# Altium PCB CNC Main Board.PcbDoc (part 1 of 2)
Units mil, origin at the board's own origin, x right, y up, seen from the top; angles counter-clockwise.
Board outline 6000 x 4000 mil, 2 copper layers (Top Layer, Bottom Layer); 82 components, 189 nets, 604 pads, 302 vias.
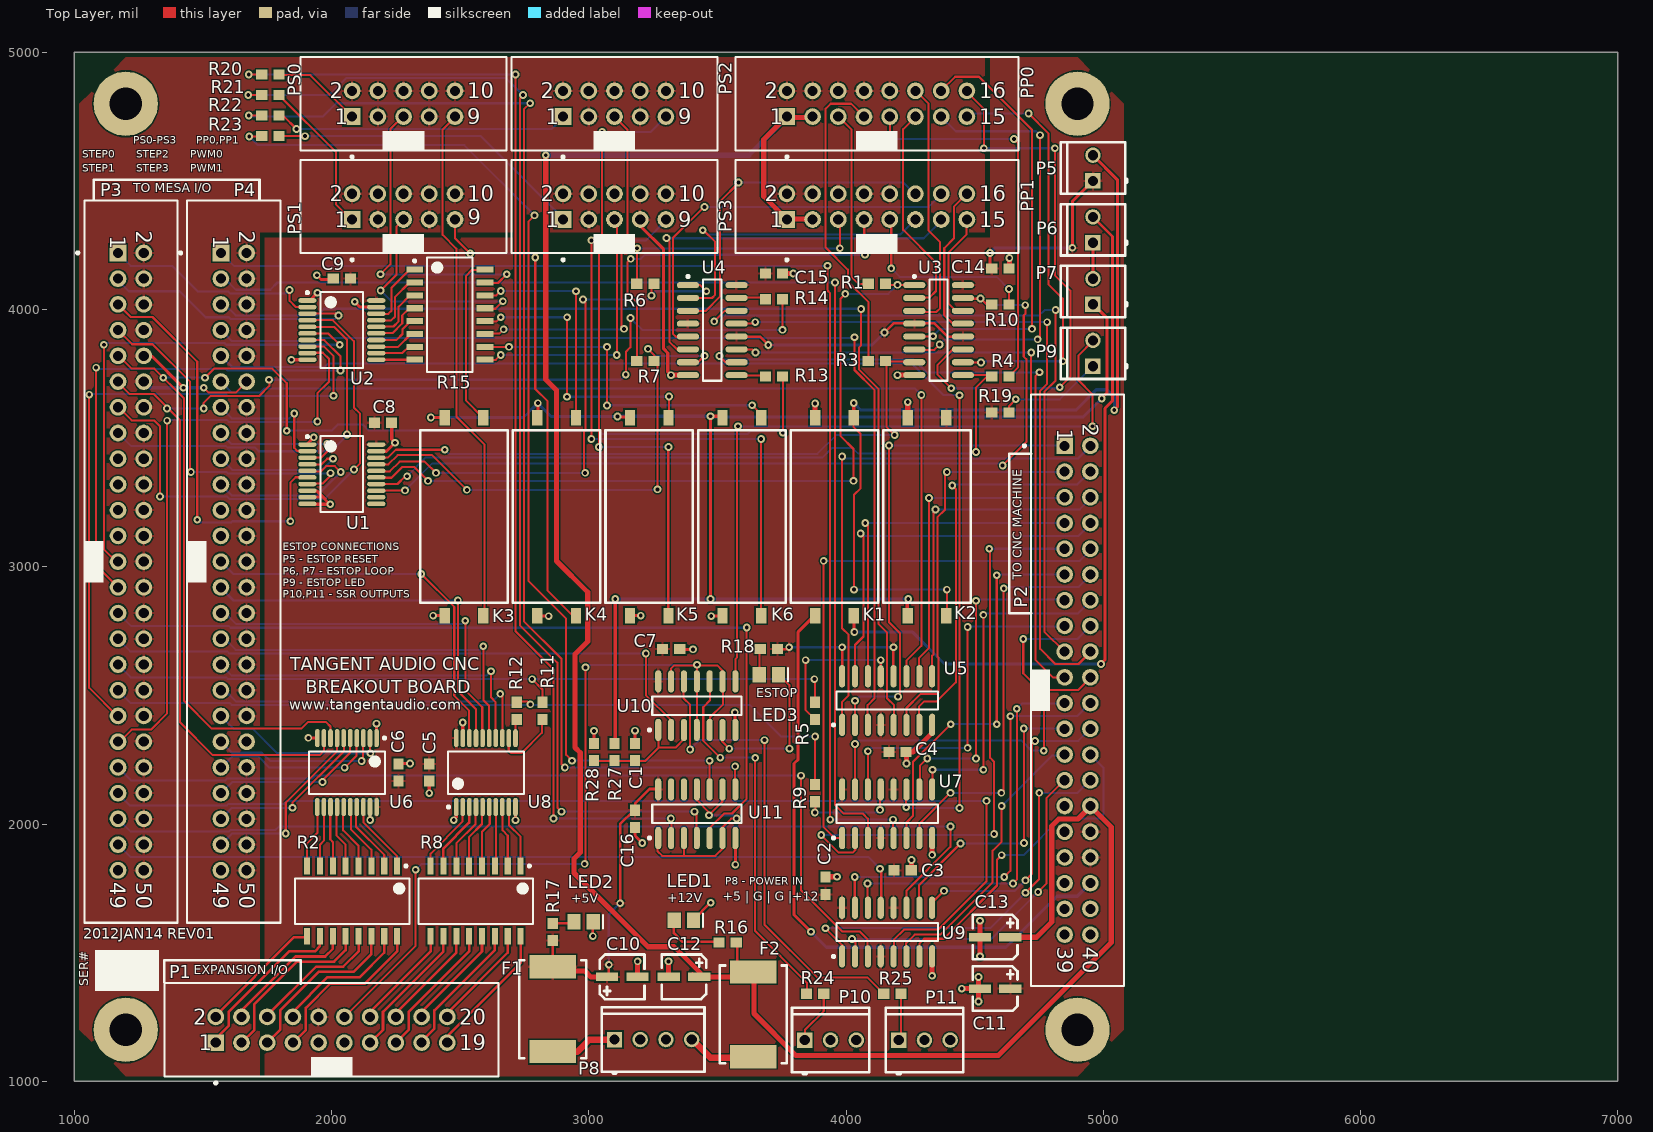
[diagram p0: Top Layer view]
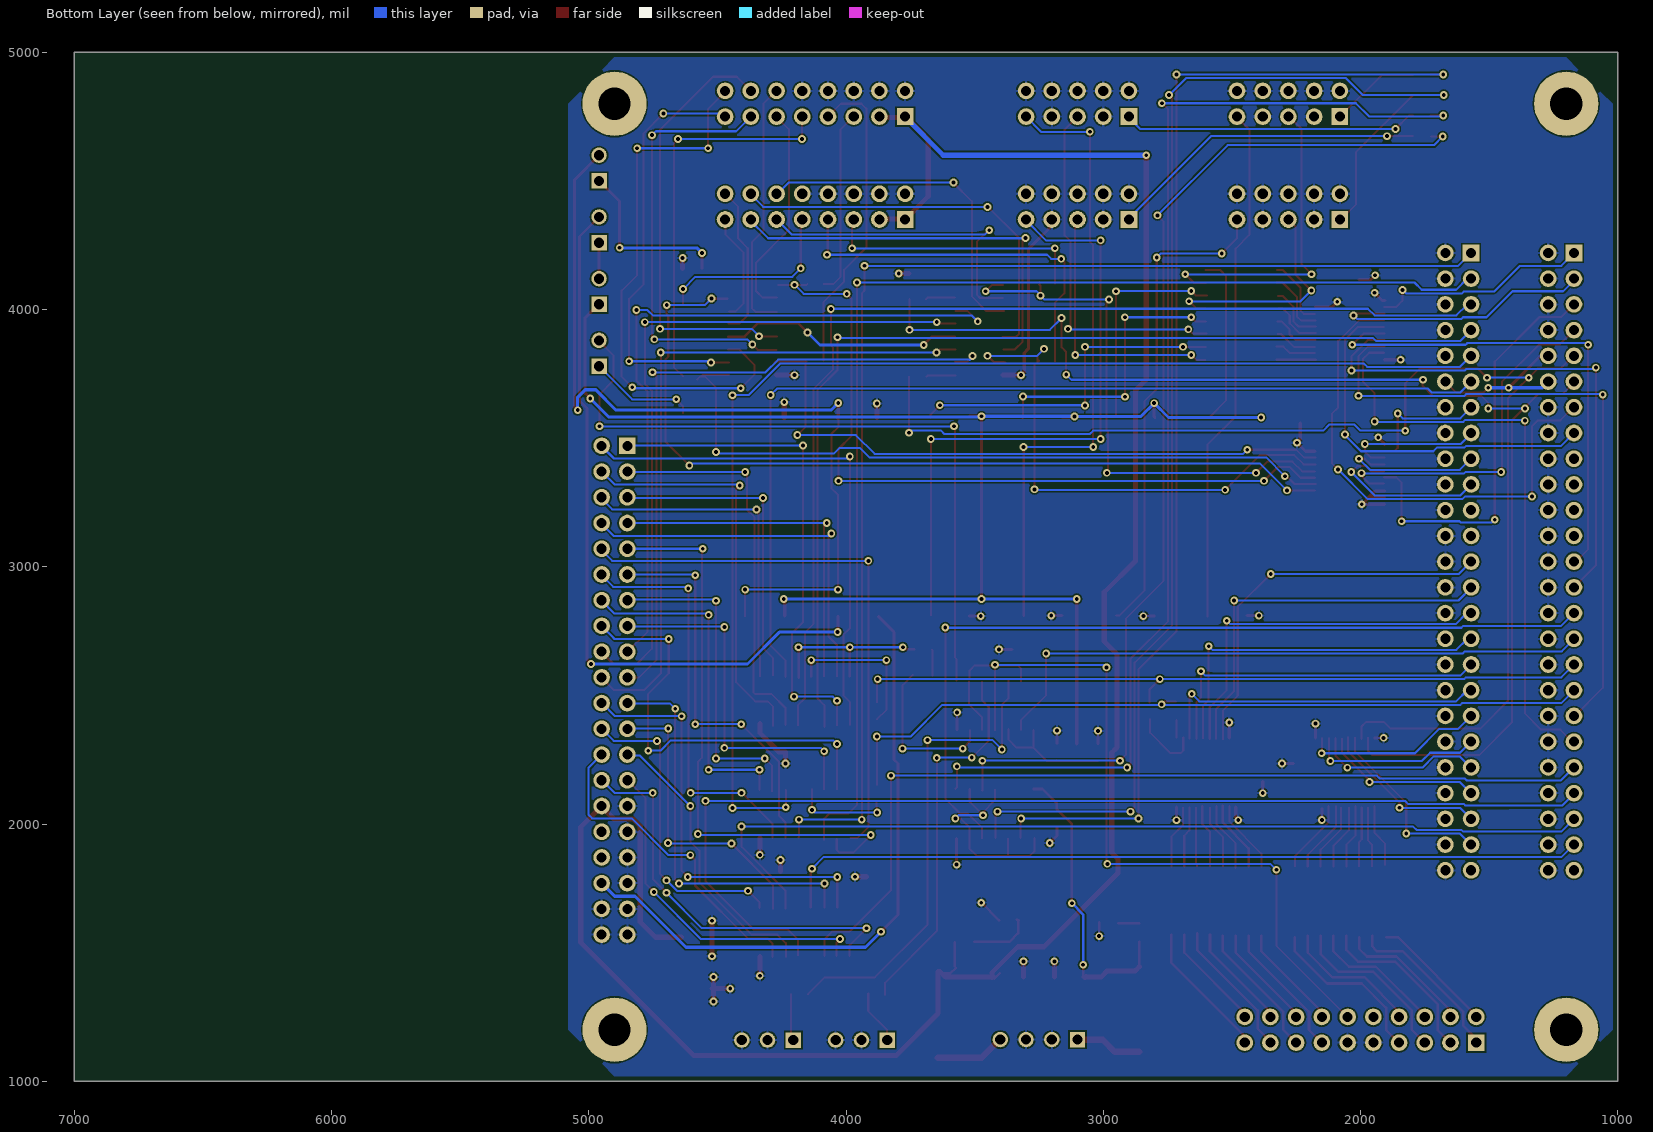
[diagram p1: Bottom Layer view, seen from below]

## Layer stack, top to bottom
Top Layer: signal copper 1.4
Dielectric: dielectric 12.6, FR-4, Dk 4.8
Bottom Layer: signal copper 1.4

## Board outline
1000,1000 7000,1000 7000,5000 1000,5000

## Design rules (kind name [scope] priority, off if disabled: settings)
Clearance [All] p1: gap=6
ComponentClearance [All] p1: gap=10 collisioncheckmode=3 verticalgap=10
HoleSize [All] p1: absolutevalues=TRUE maxlimit=125 minlimit=13 maxpercent=80.000 minpercent=20.000
MinimumAnnularRing [All] p1: minimumring=7
PolygonConnect [All] p1: connectstyle=Relief reliefconductorwidth=10 reliefentries=4 polygonreliefangle="90 Angle"
RoutingVias [All] p1: holewidth=15 width=30 viastyle="Through Hole" minholewidth=15 minwidth=30 maxholewidth=15 maxwidth=30
SolderMaskExpansion [All] p1: expansion=4
TestPointUsage [All] p1: valid=0 allowmultiple=FALSE
Testpoint [All] p1: side=15 testpointundercomponent=TRUE minsize=40 maxsize=100 preferedsize=60 minholesize=0 maxholesize=40 preferedholesize=32 testpointgrid=1 style=1023 order=0-112345678
Width [All] p1: maxlimit=30 minlimit=6 preferedwidth=10 toplayer_prefwidth=8 bottomlayer_prefwidth=8 minimp=50.000000 maximp=50.000000 favimp=50.000000
17 further rules are at their usual default settings.

## Components (designator, comment, footprint, x,y, rotation, side; value= is the part's Value field where it differs from the comment)
C1 "Cap Semi" 1608[0603] 3180,2280 r270 top
C2 "Cap Semi" 1608[0603] 3920,1760 r90 top
C3 "Cap Semi" 1608[0603] 4220,1820 r0 top
C4 "Cap Semi" 1608[0603] 4200,2280 r0 top
C5 "Cap Semi" 1608[0603] 2380,2200 r270 top
C6 "Cap Semi" 1608[0603] 2260,2200 r90 top
C7 "Cap Semi" 1608[0603] 3320,2680 r0 top
C8 "Cap Semi" 1608[0603] 2200,3560 r0 top
C9 "Cap Semi" 1608[0603] 2040,4120 r180 top
C10 "Cap Pol3" Panasonic_HA_B 3130,1406 r180 top
C11 "Cap Pol3" Panasonic_HA_B 4580,1360 r0 top
C12 "Cap Pol3" Panasonic_HA_B 3370,1406 r0 top
C13 "Cap Pol3" Panasonic_HA_B 4580,1560 r0 top
C14 "Cap Semi" 1608[0603] 4600,4160 r0 top
C15 "Cap Semi" 1608[0603] 3720,4140 r0 top
C16 "Cap Semi" 1608[0603] 3180,2020 r270 top
F1 "2.5A PTC" Littelfuse_3425L 2860,1280 r270 top
F2 "2.5A PTC" Littelfuse_3425L 3640,1260 r270 top
K1 "5V REED" ALEPH_LG1B 3880,3580 r270 top
K2 "5V REED" ALEPH_LG1B 4240,3580 r270 top
K3 "5V REED" ALEPH_LG1B 2440,3580 r270 top
K4 "5V REED" ALEPH_LG1B 2800,3580 r270 top
K5 "5V REED" ALEPH_LG1B 3160,3580 r270 top
K6 "5V REED" ALEPH_LG1B 3520,3580 r270 top
LED1 "LED3" CD2012-0805 3370,1626 r0 top
LED2 "LED3" CD2012-0805 2980,1620 r0 top
LED3 "LED3" CD2012-0805 3700,2580 r0 top
P1 "Header 10X2" IDC2.54-V20D 2000,1200 r0 top
P2 "Header 20X2" IDC2.54-V40D 4900,2520 r270 top
P3 "Header 25X2" IDC2.54-V50D 1220,3020 r270 top
P4 "Header 25X2" IDC2.54-V50D 1620,3020 r270 top
P5 "Header 2" molex_kk100_2 4960,4500 r90 top
P6 "Header 2" molex_kk100_2 4960,4260 r90 top
P7 "Header 2" molex_kk100_2 4960,4020 r90 top
P8 "Header 4" MOLEX_KK100_4 3100,1162 r0 top
P9 "Header 2" molex_kk100_2 4960,3780 r90 top
P10 "Header 3" MOLEX_KK100_3 3840,1160 r0 top
P11 "Header 3" MOLEX_KK100_3 4205,1160 r0 top
PP0 "Header 8X2" IDC2.54-V16D 4120,4800 r0 top
PP1 "Header 8X2" IDC2.54-V16D 4120,4400 r0 top
PS0 "Header 5X2" IDC2.54-V10D 2280,4800 r0 top
PS1 "Header 5X2" IDC2.54-V10D 2280,4400 r0 top
PS2 "Header 5X2" IDC2.54-V10D 3100,4800 r0 top
PS3 "Header 5X2" IDC2.54-V10D 3100,4400 r0 top
R1 "Res3" J1-0603 4120,4100 r180 top
R2 "Res Pack3" SO-16 2080,1700 r180 top
R3 "Res3" J1-0603 4120,3800 r180 top
R4 "Res3" J1-0603 4600,3740 r0 top
R5 "Res3" J1-0603 3880,2440 r270 top
R6 "Res3" J1-0603 3220,4100 r180 top
R7 "Res3" J1-0603 3220,3800 r180 top
R8 "Res Pack3" SO-16 2560,1700 r180 top
R9 "Res3" J1-0603 3880,2120 r270 top
R10 "Res3" J1-0603 4600,4020 r0 top
R11 "Res3" J1-0603 2820,2440 r270 top
R12 "Res3" J1-0603 2720,2440 r270 top
R13 "Res3" J1-0603 3720,3740 r180 top
R14 "Res3" J1-0603 3720,4040 r180 top
R15 "Res Pack3" SO-16 2460,3980 r270 top
R16 "Res3" J1-0603 3540,1540 r180 top
R17 "Res3" J1-0603 2860,1580 r90 top
R18 "Res3" J1-0603 3700,2680 r0 top
R19 "Res3" J1-0603 4600,3600 r180 top
R20 "Res3" J1-0603 1762,4914 r0 top
R21 "Res3" J1-0603 1762,4834 r0 top
R22 "Res3" J1-0603 1762,4754 r0 top
R23 "Res3" J1-0603 1762,4674 r0 top
R24 "Res3" J1-0603 3880,1340 r0 top
R25 "Res3" J1-0603 4180,1340 r0 top
R27 "Res3" J1-0603 3100,2280 r270 top
R28 "Res3" J1-0603 3020,2280 r90 top
U1 "SN74LVC541DB" DB020_L 2040,3360 r0 top
U2 "SN74LVC541DB" DB020_L 2040,3920 r0 top
U3 "MC3487D" D016_N 4360,3920 r0 top
U4 "MC3487D" D016_N 3480,3920 r0 top
U5 "MC3486D" D016_N 4160,2480 r90 top
U6 "SN74LVC541DB" DB020_L 2060,2200 r270 top
U7 "MC3486D" D016_N 4160,2040 r90 top
U8 "SN74LVC541DB" DB020_L 2600,2200 r90 top
U9 "MC3486D" D016_N 4160,1580 r90 top
U10 "74ACT14SC" M14A_N 3420,2460 r90 top
U11 "74ACT14SC" M14A_N 3420,2040 r90 top

## Footprints (in the part's own frame and the unit in brackets; to place one, negate y for a bottom-side part, rotate by r counter-clockwise, add the part's x,y. Pads: shape width x height; smd on the part's side, far side on the other; paste and mask are expansions set on the pad)
1608[0603] [mm] "Chip Capacitor; Body 1.6 x 0.8 mm (LxW typ)"
  rect 1.1x1 smd: 1(-0.85,0) 2(0.85,0)
ALEPH_LG1B [mil]
  rect 60x40 smd: 1(0,0) 3(0,150) 4(770,150) 6(770,0)
  silkscreen extent 50,-95 720,245
CD2012-0805 [mm] "Chip Diode; Body 2.0 x 1.3 mm (LxW typ)"
  rect 1.3x1.5 smd: 1(-0.95,0) 2(0.95,0)
  silkscreen extent 1.9,-0.65 1.9,0.65
D016_N [mm] "SOIC, 16-Leads, Body 9.9x3.9mm, Pitch 1.27mm, IPC Medium Density"
  oval 2.2x0.6 smd: 1(-2.4,4.445) 2(-2.4,3.175) 3(-2.4,1.905) 4(-2.4,0.635) 5(-2.4,-0.635) 6(-2.4,-1.905) 7(-2.4,-3.175) 8(-2.4,-4.445) 9(2.4,-4.445) 10(2.4,-3.175) 11(2.4,-1.905) 12(2.4,-0.635) 13(2.4,0.635) 14(2.4,1.905) 15(2.4,3.175) 16(2.4,4.445)
  silkscreen extent -2.52,-5 0.9,5.42, body extent -1.95,-4.95 1.95,4.95, height 1.75
DB020_L [mm] "SOP, 20-Leads, Body 7.2x5.3mm, Pitch 0.65mm, IPC High Density"
  oval 1.8x0.45 smd: 1(-3.4,2.925) 2(-3.4,2.275) 3(-3.4,1.625) 4(-3.4,0.975) 5(-3.4,0.325) 6(-3.4,-0.325) 7(-3.4,-0.975) 8(-3.4,-1.625) 9(-3.4,-2.275) 10(-3.4,-2.925) 11(3.4,-2.925) 12(3.4,-2.275) 13(3.4,-1.625) 14(3.4,-0.975) 15(3.4,-0.325) 16(3.4,0.325) 17(3.4,0.975) 18(3.4,1.625) 19(3.4,2.275) 20(3.4,2.925)
  silkscreen extent -3.52,-3.75 2.1,3.82, body extent -2.7,-3.75 2.7,3.75, height 2
IDC2.54-V10D [mm] "Connector; IDC, Low Profile Male Header, Thru-Hole; 10 Position; Vertical; Pitch 2.54 mm; Body 20.32 x 9.2 x 9.45 mm (LxWxH)"
  rect 1.65x1.65 hole 1: 1(-5.08,-1.27)
  round 1.65 hole 1: 2(-5.08,1.27) 3(-2.54,-1.27) 4(-2.54,1.27) 5(0,-1.27) 6(0,1.27) 7(2.54,-1.27) 8(2.54,1.27) 9(5.08,-1.27) 10(5.08,1.27)
  silkscreen extent -10.16,-5.37 10.16,4.6, body extent -10.16,-4.6 10.16,4.6, height 9.45
IDC2.54-V16D [mm] "Connector; IDC, Low Profile Male Header, Thru-Hole; 16 Position; Vertical; Pitch 2.54 mm; Body 27.94 x 9.2 x 9.45 mm (LxWxH)"
  rect 1.65x1.65 hole 1: 1(-8.89,-1.27)
  round 1.65 hole 1: 2(-8.89,1.27) 3(-6.35,-1.27) 4(-6.35,1.27) 5(-3.81,-1.27) 6(-3.81,1.27) 7(-1.27,-1.27) 8(-1.27,1.27) 9(1.27,-1.27) 10(1.27,1.27) 11(3.81,-1.27) 12(3.81,1.27) 13(6.35,-1.27) 14(6.35,1.27) 15(8.89,-1.27) 16(8.89,1.27)
  silkscreen extent -13.97,-5.37 13.97,4.6, body extent -13.97,-4.6 13.97,4.6, height 9.45
IDC2.54-V20D [mm] "Connector; IDC, Low Profile Male Header, Thru-Hole; 20 Position; Vertical; Pitch 2.54 mm; Body 33.02 x 9.2 x 9.45 mm (LxWxH)"
  rect 1.65x1.65 hole 1: 1(-11.43,-1.27)
  round 1.65 hole 1: 2(-11.43,1.27) 3(-8.89,-1.27) 4(-8.89,1.27) 5(-6.35,-1.27) 6(-6.35,1.27) 7(-3.81,-1.27) 8(-3.81,1.27) 9(-1.27,-1.27) 10(-1.27,1.27) 11(1.27,-1.27) 12(1.27,1.27) 13(3.81,-1.27) 14(3.81,1.27) 15(6.35,-1.27) 16(6.35,1.27) 17(8.89,-1.27) 18(8.89,1.27) 19(11.43,-1.27) 20(11.43,1.27)
  silkscreen extent -16.51,-5.37 16.51,4.6, body extent -16.51,-4.6 16.51,4.6, height 9.45
IDC2.54-V40D [mm] "Connector; IDC, Low Profile Male Header, Thru-Hole; 40 Position; Vertical; Pitch 2.54 mm; Body 58.42 x 9.2 x 9.45 mm (LxWxH)"
  rect 1.65x1.65 hole 1: 1(-24.13,-1.27)
  round 1.65 hole 1: 2(-24.13,1.27) 3(-21.59,-1.27) 4(-21.59,1.27) 5(-19.05,-1.27) 6(-19.05,1.27) 7(-16.51,-1.27) 8(-16.51,1.27) 9(-13.97,-1.27) 10(-13.97,1.27) 11(-11.43,-1.27) 12(-11.43,1.27) 13(-8.89,-1.27) 14(-8.89,1.27) 15(-6.35,-1.27) 16(-6.35,1.27) 17(-3.81,-1.27) 18(-3.81,1.27) 19(-1.27,-1.27) 20(-1.27,1.27) 21(1.27,-1.27) 22(1.27,1.27) 23(3.81,-1.27) 24(3.81,1.27) 25(6.35,-1.27) 26(6.35,1.27) 27(8.89,-1.27) 28(8.89,1.27) 29(11.43,-1.27) 30(11.43,1.27) 31(13.97,-1.27) 32(13.97,1.27) 33(16.51,-1.27) 34(16.51,1.27) 35(19.05,-1.27) 36(19.05,1.27) 37(21.59,-1.27) 38(21.59,1.27) 39(24.13,-1.27) 40(24.13,1.27)
  silkscreen extent -29.21,-5.37 29.21,4.6, body extent -29.21,-4.6 29.21,4.6, height 9.45
IDC2.54-V50D [mm] "Connector; IDC, Low Profile Male Header, Thru-Hole; 50 Position; Vertical; Pitch 2.54 mm; Body 71.32 x 9.2 x 9.45 mm (LxWxH)"
  rect 1.65x1.65 hole 1: 1(-30.48,-1.27)
  round 1.65 hole 1: 2(-30.48,1.27) 3(-27.94,-1.27) 4(-27.94,1.27) 5(-25.4,-1.27) 6(-25.4,1.27) 7(-22.86,-1.27) 8(-22.86,1.27) 9(-20.32,-1.27) 10(-20.32,1.27) 11(-17.78,-1.27) 12(-17.78,1.27) 13(-15.24,-1.27) 14(-15.24,1.27) 15(-12.7,-1.27) 16(-12.7,1.27) 17(-10.16,-1.27) 18(-10.16,1.27) 19(-7.62,-1.27) 20(-7.62,1.27) 21(-5.08,-1.27) 22(-5.08,1.27) 23(-2.54,-1.27) 24(-2.54,1.27) 25(0,-1.27) 26(0,1.27) 27(2.54,-1.27) 28(2.54,1.27) 29(5.08,-1.27) 30(5.08,1.27) 31(7.62,-1.27) 32(7.62,1.27) 33(10.16,-1.27) 34(10.16,1.27) 35(12.7,-1.27) 36(12.7,1.27) 37(15.24,-1.27) 38(15.24,1.27) 39(17.78,-1.27) 40(17.78,1.27) 41(20.32,-1.27) 42(20.32,1.27) 43(22.86,-1.27) 44(22.86,1.27) 45(25.4,-1.27) 46(25.4,1.27) 47(27.94,-1.27) 48(27.94,1.27) 49(30.48,-1.27) 50(30.48,1.27)
  silkscreen extent -35.66,-5.37 35.66,4.6, body extent -35.66,-4.6 35.66,4.6, height 9.45
J1-0603 [mm] "Chip Resistor; Body 1.6 x 0.8 mm (LxW typ)"
  rect 1.1x1 smd: 1(-0.85,0) 2(0.85,0)
Littelfuse_3425L [mil]
  rect 90x180 smd: 1(-165,0) 2(165,0)
  silkscreen extent -190,-130 190,130
M14A_N [mm] "SOIC, 14-Leads, Body 8.6x3.9mm, Pitch 1.27mm, IPC Medium Density"
  oval 2.2x0.6 smd: 1(-2.4,3.81) 2(-2.4,2.54) 3(-2.4,1.27) 4(-2.4,0) 5(-2.4,-1.27) 6(-2.4,-2.54) 7(-2.4,-3.81) 8(2.4,-3.81) 9(2.4,-2.54) 10(2.4,-1.27) 11(2.4,0) 12(2.4,1.27) 13(2.4,2.54) 14(2.4,3.81)
  silkscreen extent -2.52,-4.4 0.9,4.78, body extent -1.95,-4.33 1.95,4.33, height 1.75
molex_kk100_2 [mil]
  rect 60x60 hole 40: 1(0,0)
  round 60 hole 40: 2(100,0)
  silkscreen extent -50,-130 150,125
MOLEX_KK100_3 [mil]
  rect 60x60 hole 40: 1(0,0)
  round 60 hole 40: 2(100,0) 3(200,0)
  silkscreen extent -50,-130 250,125
MOLEX_KK100_4 [mil]
  rect 60x60 hole 40: 1(0,0)
  round 60 hole 40: 2(100,0) 3(200,0) 4(300,0)
  silkscreen extent -50,-130 350,125
Panasonic_HA_B [mm]
  rect 2.2x0.85 smd: 1(1.5,0) 2(-1.5,0)
  silkscreen extent -2.2,-2.2 2.2,2.2
SO-16 [mm] "Small Outline; 16 Leads; Body Width 5.6 mm; Pitch 1.27 mm"
  rect 0.6x1.65 smd: 1(-4.445,-3.475) 2(-3.175,-3.475) 3(-1.905,-3.475) 4(-0.635,-3.475) 5(0.635,-3.475) 6(1.905,-3.475) 7(3.175,-3.475) 8(4.445,-3.475) 9(4.445,3.475) 10(3.175,3.475) 11(1.905,3.475) 12(0.635,3.475) 13(-0.635,3.475) 14(-1.905,3.475) 15(-3.175,3.475) 16(-4.445,3.475)
  silkscreen extent -5.65,-3.6 5.65,2.25

## Part data
C1 C2 C3 C4 C5 C6 C7 C8 C9 C14 C15 C16: "Capacitor (Semiconductor SIM Model)"
C10 C11 C12 C13: "Polarized Capacitor (Surface Mount)"
F1 F2: library part "Fuse Thermal", "Thermal Fuse"
K1 K2 K3 K4 K5 K6: library part LG1B05BW
LED1 LED2 LED3: "Typical BLUE SiC LED"
P1: "Header, 10-Pin, Dual row"
P2: library part "Header 18X2", "Header, 18-Pin, Dual row"
P3 P4: "Header, 25-Pin, Dual row"
P5 P6 P7 P9: "Header, 2-Pin"
P8: "Header, 4-Pin"
P10 P11: "Header, 3-Pin"
PP0 PP1: "Header, 8-Pin, Dual row"
PS0 PS1 PS2 PS3: "Header, 5-Pin, Dual row"
R1 R3 R4 R5 R6 R7 R9 R10 R11 R12 R13 R14 R16 R17 R18 R19 R20 R21 R22 R23 R24 R25 R27 R28: "Resistor"
R2 R8: "Isolated Resistor Network"
R15: library part Res3, "Resistor"
U1 U2 U6 U8: "Octal Buffer/Driver with 3-State Outputs"
U3 U4: "Quadruple Differential Line Driver with 3-State Output"
U5 U7 U9: "Quadruple Line Receiver with 3-State Output"
U10: library part SN74ACT00D, "Quadruple 2-Input Positive-NAND Gate"
U11: "Hex Inverter with Schmitt Trigger Input"

## Free pads (board coordinates)
  round 250 hole 125: ""(1200,1200) ""(1200,4800) ""(4900,1200) ""(4900,4800)

## Via types
v1: diameter 30, hole 15, Top Layer to Bottom Layer, 220 vias
v2: diameter 30, hole 15, Top Layer to Bottom Layer, tented both sides, 42 vias
v3: diameter 30, hole 15, Top Layer to Bottom Layer, tented top, 40 vias

## Nets (pads, with @x,y where several pads share a name; then routed paths per layer and width w, separated by ;. In a path a pad name is that pad's centre, name@x,y a point inside that pad or via, vN(x,y) a via of type N, cw(c..) or ccw(c..) an arc to the next point about the centre after c; other vN are vias at no path point)
+12V: C12.1 C13.1 F2.1 P2.30 PP0.1 PP0.3 PP1.1 PP1.3 R16.1 | length 8749.4
  Top Layer w10: C12.1@3403,1419 C12.1@3423,1399 ; F2.1@3573,1441 3594,1420 F2.1@3640,1420 ; F2.1@3577,1447 R16.1@3577,1541
  Top Layer w20: v2(2833,4600) 2833,3728 2875,3686 2875,3022 2996,2901 2996,2709 2947,2660 2947,2297 2967,2277 2967,1889 2943,1865 2943,1810 3230,1523 3332,1523 3433,1422 C12.1@3433,1404 ; C12.1@3427,1405 3613,1405 F2.1@3634,1426 ; F2.1@3642,1426 3642,1263 3805,1100 4591,1100 ; PP0.1@3766,4747 3680,4661 3680,4440 PP1.1@3770,4350 ; PP1.1@3771,4352 PP1.3@3871,4352 ; PP0.1@3775,4747 PP0.3@3874,4747 ; 4592,1100 5031,1539 5031,1988 P2.30@4950,2069 ; C13.1@4639.06,1560 4740,1560 ; 4741,1560 4800,1619 4800,1992 4827,2019 4902,2019 P2.30@4951,2068
  Bottom Layer w20: v2(2833,4600) 3622,4600 PP0.1@3770,4748
ESTOP: K2.6 K3.1 K4.1 K5.1 K6.1 P7.1 R27.1 | length 5771.3
  Top Layer w12: v1(2386,3580) K3.1@2440,3580 ; K4.1@2798,3579 2802,3583 v1(2802,3636) ; R27.1@3103,2311 v1(3103,2875) ; v1(3112,3584) 3114,3582 K5.1@3160,3582 ; v1(3473,2875) v1@3473,3586 ; v1(3473,3585) K6.1@3519,3585 ; K2.6@4238,2808 4238,2871 v1(4242,2875) ; P7.1@4963,4019 5014,3968 5014,3674 ; v2(4994,3654) 4994,3656 5013,3675
  Bottom Layer w12: v1(2386,3580) 2746,3580 v1(2802,3636) 2854,3584 v1(3112,3584) ; v1(3103,2875) v1(4242,2875) ; v1@3112,3585 v1(3473,3585) ; v1@3469,3583 4923,3583 v2(4994,3654)
EXP_ESTOP: P1.12 U10.4 U10.5 U10.9 U10.11 U10.13 | length 3314
  Top Layer w8: P1.12@2053,1253 2327,1527 v1(2327,1822) ; v1(2984,1845) 2987,1848 v1(2987,2609) ; U10.13@3319,2555 3319,2603 3333,2617 3499,2617 3520,2596 U10.9@3520,2565 ; U10.4@3420,2363 U10.11@3420,2561 ; v1@3420,2615 3421,2614 U10.11@3421,2557 ; U10.5@3471,2365 U10.5@3471,2365.51 ; U10.5@3472,2366 3471,2367 3471,2414 3521,2464 U10.9@3521,2554.49
  Bottom Layer w8: v1(2327,1822) 2350,1845 v1(2984,1845) ; v1(2987,2609) 2996,2618 v1@3422,2618
  other v1: 3421,2619
GND: C1.1 C2.2 C3.2 C4.2 C5.2 C6.2 C7.2 C8.2 C9.2 C10.2 C11.2 C12.2 C13.2 C14.2 C15.2 C16.2 K1.1 K2.1 K3.6 K4.6 K5.6 K6.6 LED1.2 LED2.2 P1.9 P1.11 P2.29 P2.31 P2.33 P2.35 P2.37 P2.38 P2.39 P2.40 P3.2 P3.4 P3.6 P3.8 P3.10 P3.12 P3.14 P3.16 P3.18 P3.20 P3.22 P3.24 P3.26 P3.28 P3.30 P3.32 P3.34 P3.36 P3.38 P3.40 P3.42 P3.44 P3.46 P3.48 P3.50 P4.2 P4.4 P4.6 P4.8 P4.10 P4.12 P4.14 P4.16 P4.18 P4.20 P4.22 P4.24 P4.26 P4.28 P4.30 P4.32 P4.34 P4.36 P4.38 P4.40 P4.42 P4.44 P4.46 P4.48 P4.50 P8.2 P8.3 P10.2 P10.3 P11.2 P11.3 PP0.2 PP0.4 PP0.6 PP0.8 PP0.10 PP1.2 PP1.4 PP1.6 PP1.8 PP1.10 PS0.2 PS0.3 PS0.4 PS0.6 PS0.7 PS0.8 PS0.10 PS1.2 PS1.3 PS1.4 PS1.6 PS1.7 PS1.8 PS1.10 PS2.2 PS2.3 PS2.4 PS2.6 PS2.7 PS2.8 PS2.10 PS3.2 PS3.3 PS3.4 PS3.6 PS3.7 PS3.8 PS3.10 R28.2 U1.1 U1.8 U1.9 U1.10 U1.19 U2.1 U2.10 U2.19 U3.8 U4.8 U5.8 U6.1 U6.10 U6.19 U7.8 U8.1 U8.10 U8.19 U9.8 U10.7 U11.7 | length 4374
  Top Layer w8: v2(1503,3696) 1522,3677 1627,3677 P4.12@1670,3720
  Top Layer w10: v1(3016,1564) LED2.2@3016,1617 ; LED1.2@3405,1625 v1(3474,1694)
  Top Layer w12: P3.10@1272,3818 1302,3818 v2(1424,3696) ; P4.12@1649,3719 P4.12@1672,3719 ; v1(1843.84,3804.84) U2.10@1906.14,3804.84 ; U1.8@1904,3295 1942,3295 1977,3260 ; U2.1@1905,4035 1915,4035 v1(1945,4065) ; U1.9@1906.14,3270.43 1965.57,3270.43 ; U1.10@1907,3243 v3(1995,3243) ; U1.1@1907,3476 1907,3479 v1(1931,3503) ; v1(1910,2335) U6.10@1945,2335 ; v1(1943,4133) 1959,4117 C9.2@2006,4117 ; 1976.5,3259.5 v3@1994,3242 ; v3(2090,4030) 2110,4010 U2.19@2175,4010 ; v1(2150,2015.36) U6.19@2150,2060 ; U6.1@2175,2335 v1(2175,2390) ; U1.19@2176,3449 2214,3449 v1(2247,3482) 2234,3495 C8.2@2234,3558 ; C6.2@2260,2235 v1(2305,2235) ; v1(2380,2120) C5.2@2380,2165 ; v1(2395,2810) K3.6@2440,2810 ; v1(2475,2015) 2485,2025 U8.1@2485,2065 ; U8.19@2510,2335 v1(2510,2395) ; v1(2715,2015) U8.10@2715,2065 ; K4.6@2800,2808 v1(2844,2808) ; R28.2@3020,2312 v1(3020,2362) ; K5.6@3160,2810 v1(3202,2810) ; C16.2@3179,1988 3179,1955 v1(3208,1926) ; C1.1@3180,2313.46 v1(3180,2363) ; PS3.7@3201,4348 3201,4324 3291,4234 3291,3847 3307,3831 3307,3758 v1(3320,3745) ; C7.2@3354,2679 v1(3405,2679) ; v1(3476,2808) K6.6@3522,2808 ; U10.7@3568,2365 v3(3568,2434) ; v1(3570,1842) U11.7@3570,1944
  Top Layer w20: C10.2@3190,1406 v3(3190,1466) ; C12.2@3310,1406 v3(3310,1466) ; v1(3320,3745) U4.8@3390,3745 ; C15.2@3755,4140 v1(3795,4140) ; K1.1@3880,3580 v1(3880,3635) ; C2.2@3920,1795 v1(3965,1795) ; v1(4200,3745) U3.8@4270,3745 ; v1(4235,2235) 4235,2280 4260,2280 4335,2355 U5.8@4335,2390 ; K2.1@4240,3580 v1(4240,3640) ; C3.2@4255,1815 v1(4255,1860) ; v1(4335,1410) U9.8@4335,1485.51 ; v1(4335,1880) U7.8@4335,1945.51 ; v1(4450,1360) C11.2@4520.94,1360 ; v3(4515,1310) v3(4515,1405) ; v3(4520.94,1485.94) v3(4520.94,1624.06) ; C14.2@4635,4160 v1(4635,4200)
  Bottom Layer w10: v1(3474,1694) v1@3481,1694
  Bottom Layer w12: P3.12@1271,3718 1293,3696 v2@1505,3696
MACHINE_ESTOP: K1.6 P2.36 | length 2498.8
  Top Layer w12: v1(3864,1581) 3798,1647 3798,2235 3814,2251 3814,2747 K1.6@3874,2807
  Bottom Layer w12: v1(3864,1581) 3924,1521 4622,1521 4820,1719 4899,1719 P2.36@4950,1770
MESA_ENC0_A: P4.7 U5.3 | length 4043.7
  Top Layer w8: v1(4033,3892) 4033,3765 4110,3688 4110,2488 4084,2462 U5.3@4084,2378
  Bottom Layer w8: P4.7@1570,3920 1613,3877 1939,3877 1951,3889 4030,3889 v1(4033,3892)
MESA_ENC0_B: P4.5 U5.5 | length 4198.1
  Top Layer w8: v1(4059,4002) 4059,3861 4050,3852 4050,3767.8 4126,3691.8 4126,2778 4160,2744 4160,2488 4187,2461 U5.5@4187,2383
  Bottom Layer w8: P4.5@1569,4019 1585,4019 1627,3977 1945,3977 1971,4003 4058,4003 v1(4059,4002)
MESA_ENC0_IDX: P4.11 U5.11 | length 3877
  Top Layer w8: U5.11@4236,2571 4236,2636 4293,2693 v1(4293,3668)
  Bottom Layer w8: P4.11@1571,3719 1613,3677 1722,3677 1738,3693 4268,3693 v1(4293,3668)
MESA_ENC1_A: P4.3 U7.3 | length 4682.2
  Top Layer w8: v1(3957,4105) 3957,2075 3992,2040 4066,2040 4085,2021 U7.3@4085,1937
  Bottom Layer w8: P4.3@1569,4121 1584,4121 1628,4077 1762,4077 1790,4105 v1(3957,4105)
MESA_ENC1_B: P4.1 U7.5 | length 4851.1
  Top Layer w8: v1(3928,4170) 3928,4074 3938,4064 3938,2018 v3(3939,2017) ; v3(4183,2017) 4183,1949 U7.5@4185,1947
  Bottom Layer w8: P4.1@1570,4220 1620,4170 v1(3928,4170) ; v3(3939,2017) v3(4183,2017)
MESA_ENC1_IDX: P4.9 U7.11 | length 4826.8
  Top Layer w8: U7.11@4233,2133 4234,2132 v3(4234,2065) ; v1(4441,2062) v1(4441,3667)
  Bottom Layer w8: P4.9@1570,3820 1613,3777 1974,3777 1987,3790 4256,3790 4379,3667 v1(4441,3667) ; v3(4234,2065) 4237,2062 v1(4441,2062)
MESA_ENC2_A: P4.31 U8.15 | length 1412.3
  Top Layer w8: v1(2590,2691) 2590,2482 2612,2460 U8.15@2612,2332
  Bottom Layer w8: P4.31@1569,2719 1585,2719 1627,2677 2576,2677 v1(2590,2691)
MESA_ENC2_B: P4.29 U8.16 | length 1459.1
  Top Layer w8: v1(2520,2790) 2520,2520 2586,2454 U8.16@2586,2330
  Bottom Layer w8: P4.29@1571,2819 1588,2819 1630,2777 2507,2777 v1(2520,2790)
MESA_ENC2_IDX: P4.35 U8.13 | length 1292.1
  Top Layer w8: v1(2656,2506) 2665,2497 U8.13@2665,2333
  Bottom Layer w8: P4.35@1570,2519 1586,2519 1628,2477 2627,2477 v1(2656,2506)
MESA_ENC3_A: P4.27 U8.17 | length 1508.3
  Top Layer w8: v1(2491,2869) 2491,2517 2561,2447 U8.17@2561,2331
  Bottom Layer w8: P4.27@1570,2918 1619,2869 v1(2491,2869)
MESA_ENC3_B: P4.25 U8.18 | length 1518.5
  Top Layer w8: v1(2349,2972) 2477,2844 2477,2499 2535,2441 U8.18@2535,2328
  Bottom Layer w8: P4.25@1571,3019 1618,2972 v1(2349,2972)
MESA_ENC3_IDX: P4.33 U8.14 | length 1344.1
  Top Layer w8: v1(2620,2594) 2620,2492 2637,2475 U8.14@2637,2330
  Bottom Layer w8: P4.33@1571,2618 1612,2577 2603,2577 v1(2620,2594)
MESA_GI_ESTOP: P3.31 U10.2 | length 2413.4
  Top Layer w8: v1(3222,2663) 3222,2501 3320,2403 U10.2@3320,2365
  Bottom Layer w8: P3.31@1170,2718 1217,2671 1594,2671 1602,2663 v1(3222,2663)
MESA_GI_HOME0: P3.41 U9.3 | length 3531.7
  Top Layer w8: v1(3825,2188) 3825,1743 3986,1582 4054,1582 4083,1553 U9.3@4083,1487
  Bottom Layer w8: P3.41@1170,2220 1221,2169 1586,2169 1594,2177 1925,2177 1936,2188 v1(3825,2188)
MESA_GI_HOME1: P3.43 U9.5 | length 4231
  Top Layer w8: U9.5@4186,1489 4186,1550 4226,1590 4358,1590 4546,1778 v1(4546,2090)
  Bottom Layer w8: P3.43@1169,2118 1215,2072 1592,2072 1597,2077 1814,2077 1827,2090 v1(4546,2090)
MESA_GI_HOME2: P3.45 U9.11 | length 3653.8
  Top Layer w8: U9.11@4235,1672 4235,1740 4406,1911 v1(4406,1990)
  Bottom Layer w8: P3.45@1170,2020 1220,1970 1601.2,1970 1608.2,1977 1782,1977 1795,1990 v1(4406,1990)
MESA_GI_HOME3: P3.47 U9.13 | length 3152.6
  Top Layer w8: v1(4132,1826) 4137,1821 U9.13@4137,1675
  Bottom Layer w8: P3.47@1171,1919 1218,1872 4086,1872 v1(4132,1826)
MESA_GI_SPARE0: P3.33 R5.1 R11.1 | length 2928.2
  Top Layer w8: v1(2780,2563) 2820,2523 R11.1@2820,2472 ; v1(3877,2563) 3879,2561 R5.1@3879,2472
  Bottom Layer w8: P3.33@1171,2618 1219,2570 1590,2570 1597,2563 v1(3877,2563)
MESA_GI_SPARE1: P3.35 R9.1 R12.1 | length 3034.9
  Top Layer w8: R12.1@2717,2477 2761,2477 v1(2773,2465) ; R9.1@3879,2151 3879,2339 v1(3880,2340)
  Bottom Layer w8: P3.35@1170,2520 1220,2470 1605,2470 1612,2463 3626,2463 3749,2340 v1(3880,2340)
MESA_GO_PWM0_ENA: P3.5 U1.6 | length 1609.7
  Top Layer w8: P3.5@1170,4020 1219,3971 1304,3971 1478,3797 v2(1478,3183) ; v1(1840,3177) 1840,3327 1861,3348 U1.6@1908,3348
  Bottom Layer w8: v2(1478,3183) 1489,3172 1610,3172 1615,3177 v1(1840,3177)
MESA_GO_PWM1_ENA: P3.7 U1.7 | length 1371.4
  Top Layer w8: P3.7@1170,3920 1225,3865 1304,3865 1450,3719 1450,3371 v2(1453,3368) ; U1.7@1908,3323 1965,3323 1996,3354 v3(1996,3364)
  Bottom Layer w8: v2(1453,3368) 1592,3368 1596,3364 ; 1597,3363 1996,3363 v3@1997,3364
MESA_GO_SPARE0: P3.9 R13.1 U6.8 | length 5067.2
  Top Layer w8: P3.9@1170,3823 1223,3770 1311,3770 1427,3654 1427,2478 1534,2371 1883,2371 1908,2396 1979,2396 1996,2379 U6.8@1996,2331 ; v2(1508,3735) 1543,3770 1770,3770 1826,3714 v1(1826,3529) ; v1(3755,3521) R13.1@3755,3740
  Bottom Layer w8: v2(1346,3735) v2(1508,3735) ; v1(1826,3529) 2000,3529 2024,3553 2121,3553 2145,3529 3039,3529 3052,3516 3618,3516 3632,3530 3746,3530 v1(3755,3521)
MESA_GO_SPARE1: P3.11 R14.1 U6.9 | length 4982.1
  Top Layer w8: P3.11@1167,3719 1215,3671 1310,3671 1411,3570 1411,2395 1538,2268 1954,2268 1970,2284 U6.9@1970,2336 ; v2(1503,3615) 1503,3637 1529,3663 1718,3663 1758,3703 v2@1758,3726 ; v2@1757,3719 v2(1757,3727) ; v1(3144,3747) 3144,3835 3162,3853 v1(3162,3967) ; v1(3753,3921) R14.1@3753,4041
  Bottom Layer w8: v2(1360,3615) v2(1503,3615) ; v2(1757,3727) 3124,3727 v1(3144,3747) ; v1(3162,3967) 3208,3921 v1(3753,3921)
MESA_GO_STEP_DISA: P3.29 U11.5 | length 3370.8
  Top Layer w8: U11.5@3472,1944 3472,1987 3526,2041 3557,2041 3614,2098 v1(3614,2764)
  Bottom Layer w8: P3.29@1170,2820 1220,2770 1601,2770 1608,2763 3616,2763 v1@3619,2766
MESA_IO6: P4.13 U1.2 | length 501.7
  Top Layer w8: v1(1855,3596) 1855,3462 1867,3450 U1.2@1906,3450
  Bottom Layer w8: P4.13@1569,3620 1612,3577 1836,3577 v1(1855,3596)
MESA_IO7: P4.15 U1.3 | length 543.5
  Top Layer w8: U1.3@1907,3424 1959,3424 1983,3448 v3(1983,3477)
  Bottom Layer w8: P4.15@1571,3517 1611,3477 v3(1983,3477)
MESA_IO8: P4.17 U1.4 | length 577.3
  Top Layer w8: U1.4@1907,3398 1961,3398 1983,3420 v3(2006,3420)
  Bottom Layer w8: P4.17@1572,3419 1614,3377 1963,3377 v3(2006,3420)
MESA_IO9: P4.19 U1.5 | length 666.9
  Top Layer w8: U1.5@1908,3371 1959,3371 1979,3391 2013,3391 v3(2036,3368)
  Bottom Layer w8: P4.19@1571,3318 1612,3277 1945,3277 v3@2037,3369
MESA_IO10: P4.21
MESA_IO11: P4.23
MESA_IO18: P4.37 U6.2 | length 700.5
  Top Layer w8: U6.2@2150,2334 2150,2276 v3(2151,2275)
  Bottom Layer w8: P4.37@1570,2420 1620,2370 1693,2370 1788,2275 v3(2151,2275)
MESA_IO19: P4.39 U6.3 | length 669.6
  Top Layer w8: v3(2117,2245) 2123,2251 U6.3@2123,2334
  Bottom Layer w8: P4.39@1570,2320 1613,2277 1729,2277 1761,2245 v3(2117,2245)
MESA_IO20: P4.41 U6.4 | length 650.5
  Top Layer w8: v3(2051,2219) 2097,2265 U6.4@2097,2334
  Bottom Layer w8: P4.41@1571,2219 1615,2263 1715,2263 1759,2219 v3(2051,2219)
MESA_IO21: P4.43 U6.5 | length 626.7
  Top Layer w8: v3(1965,2163) 1965,2170 2071,2276 U6.5@2071,2333
  Bottom Layer w8: P4.43@1570,2120 1613,2163 v3(1965,2163)
MESA_IO22: P4.45 U6.6 | length 653.7
  Top Layer w8: v1(1848,2063) 1848,2082 2048,2282 U6.6@2048,2338
  Bottom Layer w8: P4.45@1570,2020 1613,2063 v1(1848,2063)
MESA_IO23: P4.47 U6.7 | length 739.7
  Top Layer w8: v1(1822,1963) 1822,2083 2022,2283 U6.7@2022,2336
  Bottom Layer w8: P4.47@1570,1920 P4.47@1585,1920 ; P4.47@1571,1920 1614,1963 v1(1822,1963)
MESA_IO24: P3.1 U2.2 | length 859.9
  Top Layer w8: v1(1837,4076) 1837,4034 1861,4010 U2.2@1909,4010
  Bottom Layer w8: P3.1@1171,4218 1219,4170 1380,4170 1480,4070 1598,4070 1605,4063 1823,4063 v1@1837,4077
MESA_IO25: P3.3 U2.3 | length 1049.5
  Top Layer w8: U2.3@1907,3984 2020,3984 v3(2027,3977)
  Bottom Layer w8: P3.3@1168,4115 1212,4071 1409,4071 1510,3970 1598,3970 ; 1601,3970 1608,3963 2012,3963 v3@2028,3979
MESA_IO30: P3.13 U2.4 | length 1997
  Top Layer w8: P3.13@1174,3618 1223,3569 1310,3569 1333,3546 v2(1333,3273) ; U2.4@1908,3959 2005,3959 2087,3877 2087,3619 2111,3595 2111,3402 v3(2087,3378)
  Bottom Layer w8: v2(1333,3273) 1593,3273 ; 1595,3272 1604,3263 1972,3263 v3(2087,3378)
MESA_IO31: P3.15 U2.5 | length 1485.8
  Top Layer w8: U2.5@1908,3932 2010,3932 2060,3882 v3(2060,3514)
  Bottom Layer w8: P3.15@1170,3520 1221,3469 1590,3469 1596,3463 1703,3463 1717,3449 1998,3449 v3@2060,3511
MESA_IO32: P3.17
MESA_IO33: P3.19
MESA_IO34: P3.21
MESA_IO35: P3.23
MESA_IO36: P3.25 U2.6 | length 1936
  Top Layer w8: v2(1115,3863) 1115,3068 P3.25@1168,3015 ; U2.6@1907,3907 1988,3907 v3(2032,3863)
  Bottom Layer w8: v2(1115,3863) 1122,3870 1584,3870 1591,3863 v3(2032,3863)
MESA_IO37: P3.27 U2.7 | length 2052.9
  Top Layer w8: v2(1085,3774) 1085,3005 P3.27@1170,2920 ; U2.7@1907,3881 1972,3881 2035,3818 v3(2035,3763)
  Bottom Layer w8: v2(1085,3774) 1090,3769 1589,3769 1595,3763 v3(2035,3763)
MESA_IO42: P3.37 U2.8 | length 2526.5
  Top Layer w8: v2(1058,3669) 1058,2529 P3.37@1172,2415 ; U2.8@1906,3856 1971,3856 2008,3819 v1(2008,3665)
  Bottom Layer w8: v2(1058,3669) 1060,3671 1589,3671 1595,3665 ; 1596,3664 1597,3663 2005,3663 v1@2008,3666
MESA_IO43: P3.39 U2.9 | length 2318.2
  Top Layer w8: P3.39@1172,2316 1223,2367 1298,2367 1361,2430 v2(1361,3568) ; U2.9@1908,3832 1966,3832 1990,3808 1990,3720 1945,3675 v1(1945,3565)
  Bottom Layer w8: v2(1361,3568) 1364,3571 1592,3571 1600,3563 1944,3563 v1@1946,3565
NetC1_2: C1.2 R27.2 R28.1 U10.1 U10.3 | length 490.7
  Top Layer w8: R28.1@3021,2245 3181,2245 C1.2@3182,2246 ; C1.2@3182,2245 3219,2245 3271,2297 U10.1@3271,2365.51 ; 3272,2297 3337,2297 3369,2329 U10.3@3369,2369
NetF1_2: F1.2 P8.1 | length 258.1
  Top Layer w25: F1.2@2860,1115 2956,1115 3002,1161 P8.1@3099,1161
NetF2_2: F2.2 P8.4 | length 268
  Top Layer w25: P8.4@3403,1161 3473,1091 ; 3475,1091 F2.2@3644,1091
NetK1_3: K1.3 K2.4 P5.2 | length 3376.4
  Top Layer w8: K1.3@4030,3583 4030,3543 4057,3516 4057,3306 4031,3280 v1(4031,2911) ; K2.4@4392,2806 v1(4392,2911)
  Top Layer w12: v1(4030,3637) 4030,3579 K1.3@4032,3577 ; P5.2@4960,4600 5055,4505 5055,3621 v2(5043,3609)
  Bottom Layer w8: v1(4031,2911) v1(4392,2911)
  Bottom Layer w12: v1(4030,3637) 4058,3609 4894,3609 4973,3688 ; 4972,3688 5014,3688 5043,3659 v2(5043,3609)
NetK1_4: K1.4 P6.2 | length 2861.6
  Top Layer w12: K1.4@4031,2808 4031,2747.45 v1(4032.45,2746) ; P6.2@4960,4360 5036,4284 5036,3645 5007,3616 5007,2638 v2(4991,2622)
  Bottom Layer w12: v1(4032.45,2746) 4259,2746 4383,2622 v2@4992,2622
NetK3_3: K3.3 R15.16 | length 668.7
  Top Layer w8: K3.3@2589,3580 2522,3647 2522,4130 2546,4154 R15.16@2603,4154
NetK4_3: K4.3 R15.14 | length 850.1
  Top Layer w8: R15.14@2596.81,4055 2641,4055 v1(2658,4072) ; K4.3@2949,3582 2950,3583 v1(2950,4071)
  Bottom Layer w8: v1(2658,4072) 2949,4072 v1(2950,4071)
NetK5_3: K5.3 R15.12 | length 1111.5
  Top Layer w8: R15.12@2601,3954 2642,3954 v1(2658,3970) ; v1@2916,3661 v1(2916,3970) ; v1(3312,3662) 3312,3580 K5.3@3313,3579
  Bottom Layer w8: v1(2658,3970) v1(2916,3970) ; v1(2915,3661) 3311,3661 v1(3312,3662)
NetK6_3: K6.3 R15.10 | length 1324.9
  Top Layer w8: R15.10@2600,3855 v1(2690,3855) ; v1(3071,3627) v1(3071,3855) ; v1(3635,3628) 3671,3592 K6.3@3671,3581
  Bottom Layer w8: v1(2690,3855) v1(3071,3855) ; v1@3071,3628 v1(3635,3628)